# Altium PCB EP3C25.PcbDoc (part 2 of 4)
Units mil, origin at the board's own origin, x right, y up, seen from the top; angles counter-clockwise.
Board outline 6000 x 4000 mil, 2 copper layers (Top Layer, Bottom Layer); 113 components, 182 nets, 855 pads, 215 vias.
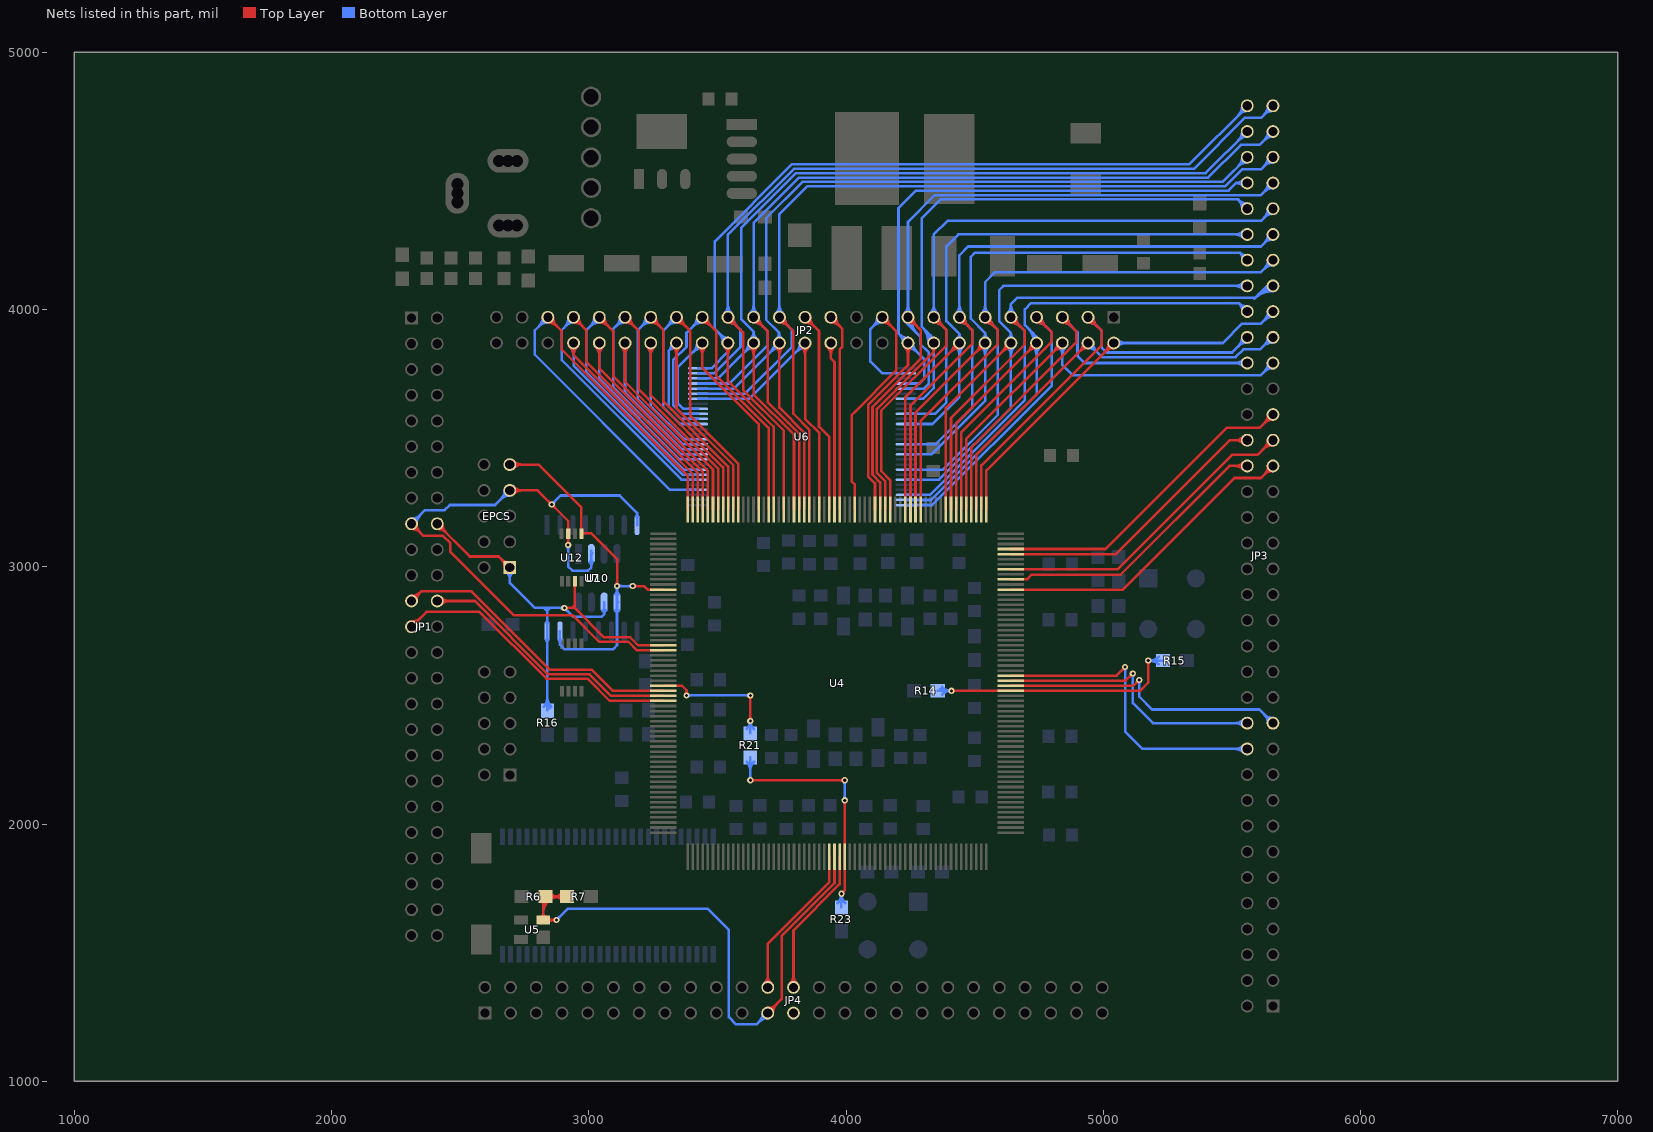
[diagram p2: the nets of this part, all layers, seen from the top]

## Via types
v1: diameter 24, hole 12, Top Layer to Bottom Layer, 205 vias
v2: diameter 40, hole 20, Top Layer to Bottom Layer, 6 vias
v3: diameter 250, hole 130, Top Layer to Bottom Layer, 3 vias
v4: diameter 250, hole 150, Top Layer to Bottom Layer, 1 vias

## Nets (pads, with @x,y where several pads share a name; then routed paths per layer and width w, separated by ;. In a path a pad name is that pad's centre, name@x,y a point inside that pad or via, vN(x,y) a via of type N, cw(c..) or ccw(c..) an arc to the next point about the centre after c; other vN are vias at no path point) (continued)
169: JP3.43 U4.169 | length 1294.5
  Top Layer w10: U4.169@4640.39,2911.47 5076.47,2911.47 5510,3345 5613,3345 JP3.43@5660,3392 ; JP3.43@5640,3392 cw(c5591.72,3392) 5625.86,3357.86 cw(c5660,3323.72) JP3.43@5660,3372
171: JP3.44 U4.171 | length 1284.3
  Top Layer w10: U4.171@4640.39,2950.84 4702.84,2950.84 4721,2969 5067,2969 5490,3392 JP3.44@5560,3392 5517,3392 ; JP3.44@5544.7,3379.11 ccw(c5517,3355.78) 5517,3392 ; JP3.44@5544.7,3404.89 cw(c5517,3428.22) 5517,3392 ; JP3.44@5545.86,3377.86 ccw(c5511.72,3343.72) 5511.72,3392 ccw(c5511.72,3440.28) JP3.44@5545.86,3406.14
173: JP3.45 U4.173 | length 1328
  Top Layer w10: U4.173@4640.39,2990.21 5055.21,2990.21 5500,3435 5600,3435 5657,3492 JP3.45@5660,3492 ; 5620.74,3455.74 cw(c5660,3416.47) JP3.45@5660,3472 ; 5627.98,3462.98 ccw(c5598.96,3492) JP3.45@5640,3492 ; 5637.81,3472.81 cw(c5660,3450.62) JP3.45@5660,3482
176: JP3.46 U4.176 | length 1178.8
  Top Layer w10: U4.176@4640.39,3049.26 5049.26,3049.26 5492,3492 JP3.46@5560,3492 ; JP3.46@5545.86,3477.86 ccw(c5511.72,3443.72) 5511.72,3492 ccw(c5511.72,3540.28) JP3.46@5545.86,3506.14
177: JP3.47 U4.177 | length 1312.1
  Top Layer w10: U4.177@4640.39,3068.95 5008.95,3068.95 5480,3540 5608,3540 JP3.47@5660,3592 ; JP3.47@5640,3592 cw(c5591.72,3592) 5625.86,3557.86 cw(c5660,3523.72) JP3.47@5660,3572
181: JP2.2 JP3.55 U4.181 | length 1749.7
  Top Layer w10: U4.181@4545.9,3222.49 4545.9,3374.9 JP2.2@5041,3870 ; JP2.2@5021,3870 cw(c4972.72,3870) 5006.86,3835.86 cw(c5041,3801.72) JP2.2@5041,3850
  Bottom Layer w10: JP2.2@5041,3870 5465,3870 5540,3945 5613,3945 JP3.55@5660,3992 ; JP2.2@5055.14,3855.86 cw(c5089.28,3821.72) 5089.28,3870 cw(c5089.28,3918.28) JP2.2@5055.14,3884.14 ; JP3.55@5640,3992 cw(c5591.72,3992) 5625.86,3957.86 cw(c5660,3923.72) JP3.55@5660,3972
182: JP2.3 JP3.54 U4.182 | length 1929.9
  Top Layer w10: U4.182@4526.22,3222.49 4526.22,3393.89 4995,3862.67 4995,3916 JP2.3@4941,3970 ; JP2.3@4941,3950 cw(c4941,3901.72) 4975.14,3935.86 cw(c5009.28,3970) JP2.3@4961,3970
  Bottom Layer w10: JP2.3@4941,3950 cw(c4941,3901.72) 4975.14,3935.86 cw(c5009.28,3970) JP2.3@4961,3970 ; JP2.3@4941,3970 4995,3916 4995,3851 5013,3833 5501,3833 JP3.54@5560,3892 ; JP3.54@5540,3892 cw(c5491.72,3892) 5525.86,3857.86 cw(c5560,3823.72) JP3.54@5560,3872
183: JP2.4 JP3.53 U4.183 | length 1853.3
  Top Layer w10: U4.183@4506.53,3222.49 4506.53,3435.53 JP2.4@4941,3870 ; JP2.4@4921,3870 cw(c4872.72,3870) 4906.86,3835.86 cw(c4941,3801.72) JP2.4@4941,3850
  Bottom Layer w10: JP2.4@4941,3850 cw(c4941,3801.72) 4975.14,3835.86 cw(c5009.28,3870) JP2.4@4961,3870 ; JP2.4@4941,3870 4996,3815 5515,3815 5545,3845 5610,3845 5657,3892 JP3.53@5660,3892 ; 5620.74,3855.74 cw(c5660,3816.47) JP3.53@5660,3872 ; 5627.98,3862.98 ccw(c5598.96,3892) JP3.53@5640,3892 ; 5637.81,3872.81 cw(c5660,3850.62) JP3.53@5660,3882
184: JP2.5 JP3.52 U4.184 | length 2012.5
  Top Layer w10: U4.184@4486.85,3222.49 4486.85,3463.52 4895,3871.67 4895,3916 JP2.5@4841,3970 ; JP2.5@4841,3950 cw(c4841,3901.72) 4875.14,3935.86 cw(c4909.28,3970) JP2.5@4861,3970
  Bottom Layer w10: JP2.5@4841,3950 cw(c4841,3901.72) 4875.14,3935.86 cw(c4909.28,3970) JP2.5@4861,3970 ; JP2.5@4841,3970 4900,3911 4900,3820 4928,3792 JP3.52@5560,3792 ; JP3.52@5545.86,3777.86 ccw(c5511.72,3743.72) 5511.72,3792 ccw(c5511.72,3840.28) JP3.52@5545.86,3806.14
185: JP2.6 JP3.51 U4.185 | length 1970.5
  Top Layer w10: U4.185@4467.16,3222.49 4467.16,3496.16 JP2.6@4841,3870 ; JP2.6@4821,3870 cw(c4772.72,3870) 4806.86,3835.86 cw(c4841,3801.72) JP2.6@4841,3850
  Bottom Layer w10: JP2.6@4826.86,3855.86 cw(c4792.72,3821.72) 4841,3821.72 cw(c4889.28,3821.72) JP2.6@4855.14,3855.86 ; JP2.6@4841,3870 4841,3784 4880,3745 5613,3745 JP3.51@5660,3792 ; JP3.51@5640,3792 cw(c5591.72,3792) 5625.86,3757.86 cw(c5660,3723.72) JP3.51@5660,3772
186: JP2.7 U4.186 U6.56 | length 2119.4
  Top Layer w10: U4.186@4447.48,3222.49 4447.48,3522.48 4800,3875 4800,3911 JP2.7@4741,3970 ; JP2.7@4741,3950 cw(c4741,3901.72) 4775.14,3935.86 cw(c4809.28,3970) JP2.7@4761,3970
  Bottom Layer w10: U6.56@4232.4,3240 4335.17,3240 4800,3704.83 4800,3911 JP2.7@4741,3970 ; JP2.7@4741,3950 cw(c4741,3901.72) 4775.14,3935.86 cw(c4809.28,3970) JP2.7@4761,3970
187: JP2.8 JP3.56 U4.187 U6.55 | length 3027.6
  Top Layer w10: U4.187@4427.79,3222.49 4427.79,3556.79 JP2.8@4741,3870 ; JP2.8@4721,3870 cw(c4672.72,3870) 4706.86,3835.86 cw(c4741,3801.72) JP2.8@4741,3850
  Bottom Layer w10: U6.55@4232.4,3259.69 4330.81,3259.69 4741,3669.88 JP2.8@4741,3870 ; 4706.96,3928.04 cw(c4648.92,3870) JP2.8@4731,3870 ; 4724.03,3910.97 cw(c4683.06,3870) JP2.8@4741,3870 ; JP2.8@4726.86,3855.86 cw(c4692.72,3821.72) 4741,3821.72 cw(c4789.28,3821.72) JP2.8@4755.14,3855.86 ; JP3.56@5540.01,3992.49 ccw(c5495.57,3993.57) 5527,4025 ; JP3.56@5559.51,4011.99 cw(c5558.43,4056.43) 5527,4025 ; JP3.56@5560,3992 5527,4025 ; JP2.8@4741,3870 4741,3894 4695,3940 4695,4000 4720,4025 5527,4025
188: JP2.9 JP3.57 U4.188 U6.54 | length 3363.1
  Top Layer w10: U4.188@4408.11,3222.49 4408.11,3578.11 4695,3865 4695,3916 JP2.9@4641,3970 ; JP2.9@4641,3950 cw(c4641,3901.72) 4675.14,3935.86 cw(c4709.28,3970) JP2.9@4661,3970
  Bottom Layer w10: U6.54@4232.4,3279.37 4326.45,3279.37 4695,3647.92 4695,3915.96 JP2.9@4641,3970 ; JP2.9@4626.86,3984.14 ccw(c4592.72,4018.28) 4641,4018.28 ccw(c4689.28,4018.28) JP2.9@4655.14,3984.14 ; JP2.9@4641,3950 cw(c4641,3901.82) 4675.07,3935.89 ; JP2.9@4641,3970 4641,4021 4665,4045 5590,4045 5637,4092 JP3.57@5660,4092 ccw(c5660,4036.47) 5620.74,4075.74 ; JP2.9@4661,3970 ccw(c4709.38,3970) 4675.17,3935.79 ; 5586.59,4041.59 cw(c5660,3968.19) JP3.57@5660,4072 ; 5603.67,4058.67 cw(c5660,4002.33) JP3.57@5660,4082
189: JP2.10 JP3.58 U4.189 U6.51 | length 3005.3
  Top Layer w10: U4.189@4388.42,3222.49 4388.42,3617.42 JP2.10@4641,3870 ; JP2.10@4621,3870 cw(c4572.72,3870) 4606.86,3835.86 cw(c4641,3801.72) JP2.10@4641,3850
  Bottom Layer w10: U6.51@4232.4,3338.43 4361.47,3338.43 4641,3617.96 JP2.10@4641,3870 4641,3909 ; JP2.10@4626.86,3855.86 cw(c4592.72,3821.72) 4641,3821.72 cw(c4689.28,3821.72) JP2.10@4655.14,3855.86 ; JP2.10@4629.33,3886.24 ccw(c4612.98,3909) 4641,3909 ; JP2.10@4652.67,3886.24 cw(c4669.02,3909) 4641,3909 ; JP3.58@5545.86,4077.86 ccw(c5511.72,4043.72) 5511.72,4092 ccw(c5511.72,4140.28) JP3.58@5545.86,4106.14 ; JP3.58@5560,4092 4612,4092 4595,4075 4595,3955 4641,3909
194: JP2.11 JP3.59 U4.194 U6.49 | length 3352.1
  Top Layer w10: U4.194@4290,3222.49 4290,3566.67 4590,3866.67 4590,3920 4541,3969 JP2.11@4541,3970 ; JP2.11@4541,3950 cw(c4541,3904.13) 4573.44,3936.56 ; JP2.11@4551,3970 ccw(c4577.56,3970) 4558.78,3951.22 ; JP2.11@4561,3970 ccw(c4611.7,3970) 4575.85,3934.15
  Bottom Layer w10: U6.49@4232.4,3377.8 4376.8,3377.8 4590,3591 4590,3921 JP2.11@4541,3970 4541,4106 4580,4145 5613,4145 JP3.59@5660,4192 ; JP2.11@4526.86,3984.14 ccw(c4492.72,4018.28) 4541,4018.28 ccw(c4589.28,4018.28) JP2.11@4555.14,3984.14 ; JP2.11@4541,3950 cw(c4541,3901.72) 4575.14,3935.86 cw(c4609.28,3970) JP2.11@4561,3970 ; JP3.59@5640,4192 cw(c5591.72,4192) 5625.86,4157.86 cw(c5660,4123.72) JP3.59@5660,4172
195: JP2.12 JP3.60 U4.195 U6.46 | length 3089.9
  Top Layer w10: U4.195@4270.31,3222.49 4270.31,3599.31 JP2.12@4541,3870 ; JP2.12@4521,3870 cw(c4472.72,3870) 4506.86,3835.86 cw(c4541,3801.72) JP2.12@4541,3850
  Bottom Layer w10: U6.46@4232.4,3436.85 4332.89,3436.85 4541,3644.96 JP2.12@4541,3870 4541,3909 ; JP2.12@4526.86,3855.86 cw(c4492.72,3821.72) 4541,3821.72 cw(c4589.28,3821.72) JP2.12@4555.14,3855.86 ; JP2.12@4529.33,3886.24 ccw(c4512.98,3909) 4541,3909 ; JP2.12@4552.67,3886.24 cw(c4569.02,3909) 4541,3909 ; JP3.60@5540.22,4194.99 ccw(c5511.36,4199.35) 5532,4220 ; JP3.60@5557.01,4211.78 cw(c5552.65,4240.64) 5532,4220 ; JP3.60@5560,4192 5532,4220 ; 4541,3909 4485,3965 4485,4205 4500,4220 5532,4220
196: JP2.13 JP3.61 U4.196 U6.44 | length 3352.5
  Top Layer w10: U4.196@4250.63,3222.49 4250.63,3627.3 4490,3866.67 4490,3921 JP2.13@4441,3970 ; JP2.13@4441,3950 cw(c4441,3901.72) 4475.14,3935.86 cw(c4509.28,3970) JP2.13@4461,3970
  Bottom Layer w10: U6.44@4232.4,3476.22 4348.22,3476.22 4490,3618 4490,3921 JP2.13@4441,3970 4441,4211 4475,4245 5613,4245 JP3.61@5660,4292 ; JP2.13@4426.86,3984.14 ccw(c4392.72,4018.28) 4441,4018.28 ccw(c4489.28,4018.28) JP2.13@4455.14,3984.14 ; JP2.13@4441,3950 cw(c4441,3901.72) 4475.14,3935.86 cw(c4509.28,3970) JP2.13@4461,3970 ; JP3.61@5640,4292 cw(c5591.72,4292) 5625.86,4257.86 cw(c5660,4223.72) JP3.61@5660,4272
197: JP2.14 JP3.62 U4.197 U6.40 | length 3050
  Top Layer w10: U4.197@4230.94,3222.49 4230.94,3659.94 JP2.14@4441,3870 ; JP2.14@4421,3870 cw(c4372.72,3870) 4406.86,3835.86 cw(c4441,3801.72) JP2.14@4441,3850
  Bottom Layer w10: U6.40@4232.4,3554.96 4336,3554.96 4441,3659.96 JP2.14@4441,3870 4441,3904 ; JP2.14@4426.86,3855.86 cw(c4392.72,3821.72) 4441,3821.72 cw(c4489.28,3821.72) JP2.14@4455.14,3855.86 ; JP2.14@4431.28,3887.48 ccw(c4422.1,3904) 4441,3904 ; JP2.14@4450.72,3887.48 cw(c4459.9,3904) 4441,3904 ; JP3.62@5545.86,4277.86 ccw(c5511.72,4243.72) 5511.72,4292 ccw(c5511.72,4340.28) JP3.62@5545.86,4306.14 ; JP3.62@5560,4292 4437,4292 4390,4245 4390,3955 4441,3904
200: JP2.15 JP3.63 U4.200 U6.38 | length 3400.3
  Top Layer w10: U4.200@4171.89,3222.49 4171.89,3337.11 4137,3372 4137,3607 4390,3860 4390,3921 JP2.15@4341,3970 ; JP2.15@4341,3950 cw(c4341,3901.72) 4375.14,3935.86 cw(c4409.28,3970) JP2.15@4361,3970
  Bottom Layer w10: U6.38@4232.4,3594.33 4346.33,3594.33 4390,3638 4390,3921 JP2.15@4341,3970 4341,4291 4395,4345 5613,4345 JP3.63@5660,4392 ; JP2.15@4326.86,3984.14 ccw(c4292.72,4018.28) 4341,4018.28 ccw(c4389.28,4018.28) JP2.15@4355.14,3984.14 ; JP2.15@4341,3950 cw(c4341,3901.72) 4375.14,3935.86 cw(c4409.28,3970) JP2.15@4361,3970 ; JP3.63@5640,4392 cw(c5591.72,4392) 5625.86,4357.86 cw(c5660,4323.72) JP3.63@5660,4372
201: JP2.16 JP3.64 U4.201 U6.35 | length 3140.2
  Top Layer w10: U4.201@4152.2,3222.49 4152.2,3332.75 4120,3364.96 4120,3614.04 4341,3835.04 ; JP2.16@4330.86,3852.76 cw(c4320.45,3835.04) 4341,3835.04 ; JP2.16@4341,3870 4341,3835.04 ; JP2.16@4351.14,3852.76 ccw(c4361.55,3835.04) 4341,3835.04
  Bottom Layer w10: U6.35@4232.4,3653.39 4300.39,3653.39 4341,3694 4341,3887 4295,3933 4295,4355 4368,4428 5524,4428 JP3.64@5560,4392 ; 4294.84,3933.16 cw(c4231.67,3870) JP2.16@4321,3870 ; 4311.91,3916.09 cw(c4265.82,3870) JP2.16@4331,3870 ; 4328.98,3899.02 cw(c4299.96,3870) JP2.16@4341,3870 ; JP3.64@5540,4392 ccw(c5491.72,4392) 5525.86,4426.14 ccw(c5560,4460.28) JP3.64@5560,4412
202: JP2.17 JP3.65 U4.202 U6.33 | length 3555.5
  Top Layer w10: U4.202@4132.52,3222.49 4132.52,3328.4 4103,3357.92 4103,3621.08 4290,3808.08 4290,3921 JP2.17@4241,3970 ; JP2.17@4241,3950 cw(c4241,3901.72) 4275.14,3935.86 cw(c4309.28,3970) JP2.17@4261,3970
  Bottom Layer w10: JP2.17@4226.86,3984.14 ccw(c4192.72,4018.28) 4241,4018.28 ccw(c4289.28,4018.28) JP2.17@4255.14,3984.14 ; JP2.17@4231.43,3972.89 ccw(c4258.77,3964.63) 4238.57,3944.43 ; U6.33@4232.4,3692.76 4302.76,3692.76 4322,3712 4322,3833 4288,3867 4288,3895 4241,3942 ; JP2.17@4241,3970 ccw(c4276.9,3959.14) 4250.38,3932.62 ; JP2.17@4250.57,3967.11 ccw(c4295.04,3953.66) 4262.19,3920.81 ; JP2.17@4260.14,3964.21 ccw(c4313.17,3948.17) 4274,3909 ; JP3.65@5640,4492 cw(c5591.72,4492) 5625.86,4457.86 cw(c5660,4423.72) JP3.65@5660,4472 ; JP3.65@5660,4492 5613,4445 4345,4445 4241,4341 4241,3942 ; 4241,3942 ccw(c4231.4,3942) 4234.51,3951.08 cw(c4231.4,3942) 4241,3942 ; 4241,3942 cw(c4250.6,3942) 4247.49,3951.08 ccw(c4250.6,3942) 4241,3942
203: JP2.18 JP3.66 U4.203 U6.32 | length 3194.6
  Top Layer w10: U4.203@4112.83,3222.49 4112.83,3324.04 4086,3350.88 4086,3629 4241,3784 JP2.18@4241,3870 ; JP2.18@4226.86,3855.86 cw(c4192.72,3821.72) 4241,3821.72 cw(c4289.28,3821.72) JP2.18@4255.14,3855.86
  Bottom Layer w10: JP2.18@4221,3870 ccw(c4172.72,3870) 4206.86,3904.14 ccw(c4241,3938.28) JP2.18@4241,3890 ; U6.32@4232.4,3712.44 4285.44,3712.44 4305,3732 4305,3806 JP2.18@4241,3870 4204,3907 4204,4394 4272,4462 5487,4462 5517,4492 ; JP2.18@4241,3850 cw(c4241,3801.72) 4275.14,3835.86 cw(c4309.28,3870) JP2.18@4261,3870 ; JP3.66@5544.7,4479.11 ccw(c5517,4455.78) 5517,4492 ; JP3.66@5544.7,4504.89 cw(c5517,4528.22) 5517,4492 ; JP3.66@5560,4492 5517,4492
207: JP2.19 U4.207 U6.30 | length 1345.8
  Top Layer w10: U4.207@4034.09,3222.49 4034.09,3289 4034.09,3318.91 4022,3331 4022,3590 4034.09,3602.09 4195,3763 4195,3916 JP2.19@4141,3970 ; JP2.19@4141,3950 cw(c4141,3901.72) 4175.14,3935.86 cw(c4209.28,3970) JP2.19@4161,3970
  Bottom Layer w10: JP2.19@4121,3970 cw(c4072.72,3970) 4106.86,3935.86 cw(c4141,3901.72) JP2.19@4141,3950 ; JP2.19@4141,3970 4095,3924 4095,3798 4141.19,3751.81 U6.30@4232.4,3751.81
214: JP2.26 U4.214 U6.22 | length 1327.8
  Top Layer w10: JP2.26@3826.86,3855.86 cw(c3792.72,3821.72) 3841,3821.72 cw(c3889.28,3821.72) JP2.26@3855.14,3855.86 ; JP2.26@3841,3870 3841,3574.96 3896.3,3519.66 U4.214@3896.3,3222.49
  Bottom Layer w10: U6.22@3425,3653.39 3624.39,3653.39 JP2.26@3841,3870 ; JP2.26@3821,3870 cw(c3772.72,3870) 3806.86,3835.86 cw(c3841,3801.72) JP2.26@3841,3850
216: JP2.27 JP3.67 U4.216 U6.23 | length 4086.1
  Top Layer w10: JP2.27@3741,3950 cw(c3741,3901.72) 3775.14,3935.86 cw(c3809.28,3970) JP2.27@3761,3970 ; JP2.27@3741,3970 3795,3916 3795,3595 3856.93,3533.07 U4.216@3856.93,3222.49
  Bottom Layer w10: U6.23@3425,3673.07 3608.07,3673.07 3790,3855 3790,3921 JP2.27@3741,3970 3741,4371 3849,4479 5474,4479 5540,4545 5613,4545 JP3.67@5660,4592 ; JP2.27@3726.86,3984.14 ccw(c3692.72,4018.28) 3741,4018.28 ccw(c3789.28,4018.28) JP2.27@3755.14,3984.14 ; JP2.27@3741,3950 cw(c3741,3901.72) 3775.14,3935.86 cw(c3809.28,3970) JP2.27@3761,3970 ; JP3.67@5640,4592 cw(c5591.72,4592) 5625.86,4557.86 cw(c5660,4523.72) JP3.67@5660,4572
217: JP2.28 JP3.68 U4.217 U6.24 | length 3834.3
  Top Layer w10: JP2.28@3726.86,3855.86 cw(c3692.72,3821.72) 3741,3821.72 cw(c3789.28,3821.72) JP2.28@3755.14,3855.86 ; JP2.28@3741,3870 3741,3618.33 3837.24,3522.08 U4.217@3837.24,3222.49
  Bottom Layer w10: U6.24@3425,3692.76 3563.76,3692.76 JP2.28@3741,3870 3740,3871 3740,3910 ; JP2.28@3721,3870 cw(c3672.72,3870) 3706.86,3835.86 cw(c3741,3801.72) JP2.28@3741,3850 ; JP2.28@3728.36,3885.5 ccw(c3708.4,3910) 3740,3910 ; JP2.28@3752.36,3886.46 cw(c3768.59,3910) 3740,3910 ; JP3.68@5540,4592 cw(c5491.72,4592) 5525.86,4557.86 cw(c5560,4523.72) JP3.68@5560,4572 ; JP3.68@5560,4592 5464,4496 3831,4496 3690,4355 3690,3960 3740,3910
218: JP2.29 JP3.69 U4.218 U6.25 | length 4120
  Top Layer w10: JP2.29@3641,3950 cw(c3641,3901.72) 3675.14,3935.86 cw(c3709.28,3970) JP2.29@3661,3970 ; JP2.29@3641,3970 3695,3916 3695,3640.29 3817.56,3517.73 U4.218@3817.56,3222.49
  Bottom Layer w10: U6.25@3425,3712.44 3547.44,3712.44 3695,3860 3695,3916 JP2.29@3641,3970 3641,4336 3818,4513 5408,4513 5535,4640 5608,4640 JP3.69@5660,4692 ; JP2.29@3626.86,3984.14 ccw(c3592.72,4018.28) 3641,4018.28 ccw(c3689.28,4018.28) JP2.29@3655.14,3984.14 ; JP2.29@3641,3950 cw(c3641,3901.72) 3675.14,3935.86 cw(c3709.28,3970) JP2.29@3661,3970 ; JP3.69@5640,4692 cw(c5591.72,4692) 5625.86,4657.86 cw(c5660,4623.72) JP3.69@5660,4672
219: JP2.30 JP3.70 U4.219 U6.26 | length 3868
  Top Layer w10: JP2.30@3626.86,3855.86 cw(c3592.72,3821.72) 3641,3821.72 cw(c3689.28,3821.72) JP2.30@3655.14,3855.86 ; JP2.30@3641,3870 3641,3670.24 3797.87,3513.37 U4.219@3797.87,3222.49
  Bottom Layer w10: U6.26@3425,3732.13 3503.13,3732.13 JP2.30@3641,3870 3641,3914 ; JP2.30@3621,3870 cw(c3572.72,3870) 3606.86,3835.86 cw(c3641,3801.72) JP2.30@3641,3850 ; JP2.30@3627.85,3885.07 ccw(c3602.6,3914) 3641,3914 ; JP2.30@3654.15,3885.07 cw(c3679.4,3914) 3641,3914 ; JP3.70@5540,4692 cw(c5491.72,4692) 5525.86,4657.86 cw(c5560,4623.72) JP3.70@5560,4672 ; JP3.70@5560,4692 5398,4530 3805,4530 3593.5,4318.5 3593.5,3961.5 3641,3914
221: JP2.31 JP3.71 U4.221 U6.27 | length 4131.5
  Top Layer w10: JP2.31@3541,3950 cw(c3541,3901.72) 3575.14,3935.86 cw(c3609.28,3970) JP2.31@3561,3970 ; JP2.31@3541,3970 3600,3911 3600,3687.2 3758.5,3528.7 U4.221@3758.5,3222.49
  Bottom Layer w10: U6.27@3425,3751.81 3486.81,3751.81 3590,3855 3590,3921 JP2.31@3541,3970 3541,4291 3797,4547 5352,4547 5550,4745 5613,4745 JP3.71@5660,4792 ; JP2.31@3526.86,3984.14 ccw(c3492.72,4018.28) 3541,4018.28 ccw(c3589.28,4018.28) JP2.31@3555.14,3984.14 ; JP2.31@3541,3950 cw(c3541,3901.72) 3575.14,3935.86 cw(c3609.28,3970) JP2.31@3561,3970 ; JP3.71@5640,4792 cw(c5591.72,4792) 5625.86,4757.86 cw(c5660,4723.72) JP3.71@5660,4772
223: JP2.32 JP3.72 U4.223 U6.28 | length 3920.6
  Top Layer w10: JP2.32@3526.86,3855.86 cw(c3492.72,3821.72) 3541,3821.72 cw(c3589.28,3821.72) JP2.32@3555.14,3855.86 ; JP2.32@3541,3870 3541,3722.16 3719.13,3544.03 U4.223@3719.13,3222.49
  Bottom Layer w10: U6.28@3425,3771.5 3476.5,3771.5 3541,3836 ; 3504.03,3910.97 cw(c3463.06,3870) JP2.32@3521,3870 ; 3513.69,3901.31 ccw(c3541,3928.63) JP2.32@3541,3890 ; 3521.1,3893.9 cw(c3497.2,3870) JP2.32@3531,3870 ; JP2.32@3531.28,3852.52 cw(c3522.1,3836) 3541,3836 ; JP2.32@3550.72,3852.52 ccw(c3559.9,3836) 3541,3836 ; 5524.44,4754.44 ccw(c5486.89,4792) JP3.72@5540,4792 ; 5529.27,4759.27 cw(c5560,4728.54) JP3.72@5560,4772 ; 5541.51,4771.51 ccw(c5521.03,4792) JP3.72@5550,4792 ; JP3.72@5560,4792 5560,4790 5334,4564 3789,4564 3490,4265 3490,3925 3541,3874 JP2.32@3541,3870 3541,3836
224: JP2.33 U4.224 U6.19 | length 1505.1
  Top Layer w10: JP2.33@3441,3950 cw(c3441,3901.72) 3475.14,3935.86 cw(c3509.28,3970) JP2.33@3461,3970 ; JP2.33@3441,3970 3495,3916 3495,3744.12 3699.45,3539.67 U4.224@3699.45,3222.49
  Bottom Layer w10: JP2.33@3421,3970 cw(c3372.72,3970) 3406.86,3935.86 cw(c3441,3901.72) JP2.33@3441,3950 ; U6.19@3425,3594.33 3363.21,3594.33 3328,3629.54 3328,3803 3380,3855 3380,3909 JP2.33@3441,3970
226: JP2.34 U4.226 U6.20 | length 1252.5
  Top Layer w10: JP2.34@3426.86,3855.86 cw(c3392.72,3821.72) 3441,3821.72 cw(c3489.28,3821.72) JP2.34@3455.14,3855.86 ; JP2.34@3441,3870 3441,3774.08 3660.08,3555 U4.226@3660.08,3222.49
  Bottom Layer w10: JP2.34@3421,3870 cw(c3372.72,3870) 3406.86,3835.86 cw(c3441,3801.72) JP2.34@3441,3850 ; U6.20@3425,3614.02 3367.57,3614.02 3345,3636.58 3345,3774 JP2.34@3441,3870
230: JP2.35 U4.230 U6.17 | length 1532.1
  Top Layer w10: JP2.35@3341,3950 cw(c3341,3901.72) 3375.14,3935.86 cw(c3409.28,3970) JP2.35@3361,3970 ; JP2.35@3341,3970 3395,3916 3395,3585.42 3581.34,3399.08 U4.230@3581.34,3222.49
  Bottom Layer w10: JP2.35@3321,3970 cw(c3272.72,3970) 3306.86,3935.86 cw(c3341,3901.72) JP2.35@3341,3950 ; JP2.35@3341,3970 3290,3919 3290,3619.46 3354.5,3554.96 U6.17@3425,3554.96
231: JP2.36 U4.231 U6.18 | length 1270.2
  Top Layer w10: JP2.36@3326.86,3855.86 cw(c3292.72,3821.72) 3341,3821.72 cw(c3389.28,3821.72) JP2.36@3355.14,3855.86 ; JP2.36@3341,3870 3341,3615.37 3561.65,3394.72 U4.231@3561.65,3222.49
  Bottom Layer w10: JP2.36@3321.09,3868.09 cw(c3286.26,3864.75) 3311,3840 ; JP2.36@3339.09,3850.09 ccw(c3335.75,3815.26) 3311,3840 ; JP2.36@3341,3870 3311,3840 ; U6.18@3425,3574.65 3358.85,3574.65 3311,3622.5 3311,3840
232: JP2.37 U4.232 U6.13 | length 1670.2
  Top Layer w10: JP2.37@3241,3950 cw(c3241,3901.72) 3275.14,3935.86 cw(c3309.28,3970) JP2.37@3261,3970 ; JP2.37@3241,3970 3290,3921 3290,3642.33 3541.97,3390.36 U4.232@3541.97,3222.49
  Bottom Layer w10: JP2.37@3221,3970 cw(c3172.72,3970) 3206.86,3935.86 cw(c3241,3901.72) JP2.37@3241,3950 ; JP2.37@3241,3970 3190,3919 3190,3652.96 3366.74,3476.22 U6.13@3425,3476.22
233: JP2.38 U4.233 U6.14 | length 1397.6
  Top Layer w10: JP2.38@3226.86,3855.86 cw(c3192.72,3821.72) 3241,3821.72 cw(c3289.28,3821.72) JP2.38@3255.14,3855.86 ; JP2.38@3241,3870 3241,3667.29 3522.28,3386.01 U4.233@3522.28,3222.49
  Bottom Layer w10: JP2.38@3226.86,3855.86 cw(c3192.72,3821.72) 3241,3821.72 cw(c3289.28,3821.72) JP2.38@3255.14,3855.86 ; JP2.38@3241,3870 3241,3626 3371.09,3495.91 U6.14@3425,3495.91
234: JP2.39 U4.234 U6.11 | length 1777.1
  Top Layer w10: JP2.39@3141,3950 cw(c3141,3901.72) 3175.14,3935.86 cw(c3209.28,3970) JP2.39@3161,3970 ; JP2.39@3141,3970 3195,3916 3195,3689.25 3502.6,3381.65 U4.234@3502.6,3222.49
  Bottom Layer w10: JP2.39@3121,3970 cw(c3072.72,3970) 3106.86,3935.86 cw(c3141,3901.72) JP2.39@3141,3950 ; JP2.39@3141,3970 3095,3924 3095,3699.88 3358.03,3436.85 U6.11@3425,3436.85
235: JP2.40 U4.235 U6.12 | length 1508.6
  Top Layer w10: JP2.40@3126.86,3855.86 cw(c3092.72,3821.72) 3141,3821.72 cw(c3189.28,3821.72) JP2.40@3155.14,3855.86 ; JP2.40@3141,3870 3141,3719.21 3482.91,3377.29 U4.235@3482.91,3222.49
  Bottom Layer w10: JP2.40@3126.86,3855.86 cw(c3092.72,3821.72) 3141,3821.72 cw(c3189.28,3821.72) JP2.40@3155.14,3855.86 ; JP2.40@3141,3870 3141,3677.92 3362.38,3456.54 U6.12@3425,3456.54
236: JP2.41 U4.236 U6.8 | length 1900.4
  Top Layer w10: JP2.41@3041,3950 cw(c3041,3901.72) 3075.14,3935.86 cw(c3109.28,3970) JP2.41@3061,3970 ; JP2.41@3041,3970 3095,3916 3095,3741.17 3463.23,3372.94 U4.236@3463.23,3222.49
  Bottom Layer w10: JP2.41@3021,3970 cw(c2972.72,3970) 3006.86,3935.86 cw(c3041,3901.72) JP2.41@3041,3950 ; JP2.41@3041,3970 2990,3919 2990,3756.79 3369,3377.8 U6.8@3425,3377.8
237: JP2.42 U4.237 U6.10 | length 1619.6
  Top Layer w10: JP2.42@3026.86,3855.86 cw(c2992.72,3821.72) 3041,3821.72 cw(c3089.28,3821.72) JP2.42@3055.14,3855.86 ; JP2.42@3041,3870 3041,3771.12 3443.54,3368.58 U4.237@3443.54,3222.49
  Bottom Layer w10: JP2.42@3026.86,3855.86 cw(c2992.72,3821.72) 3041,3821.72 cw(c3089.28,3821.72) JP2.42@3055.14,3855.86 ; JP2.42@3041,3870 3041,3729.83 3353.67,3417.17 U6.10@3425,3417.17
238: JP2.43 U4.238 U6.6 | length 2033.8
  Top Layer w10: JP2.43@2941,3950 cw(c2941,3901.72) 2975.14,3935.86 cw(c3009.28,3970) JP2.43@2961,3970 ; JP2.43@2941,3970 2990,3921 2990,3798.08 3423.86,3364.23 U4.238@3423.86,3222.49
  Bottom Layer w10: 2904.03,3929.03 ccw(c2863.06,3970) JP2.43@2921,3970 ; 2913.69,3938.69 cw(c2941,3911.37) JP2.43@2941,3950 ; 2921.1,3946.1 ccw(c2897.2,3970) JP2.43@2931,3970 ; JP2.43@2941,3970 2941,3966 2895,3920 2895,3803.71 3360.28,3338.43 U6.6@3425,3338.43
239: JP2.44 U4.239 U6.7 | length 1735.6
  Top Layer w10: JP2.44@2927.14,3855.58 cw(c2895.88,3823.04) 2941,3823.04 ; JP2.44@2941,3870 2941,3823.04 ; JP2.44@2954.86,3855.58 ccw(c2986.12,3823.04) 2941,3823.04 ; U4.239@3404.17,3222.49 3404.17,3359.87 2941,3823.04
  Bottom Layer w10: JP2.44@2926.86,3855.86 cw(c2892.72,3821.72) 2941,3821.72 cw(c2989.28,3821.72) JP2.44@2955.14,3855.86 ; JP2.44@2941,3870 2941,3781.75 3364.64,3358.11 U6.7@3425,3358.11
240: JP2.45 U4.240 U6.4 | length 2143.3
  Top Layer w10: JP2.45@2841,3950 cw(c2841,3901.72) 2875.14,3935.86 cw(c2909.28,3970) JP2.45@2861,3970 ; JP2.45@2841,3970 2895,3916 2895,3845 3384.49,3355.51 U4.240@3384.49,3222.49
  Bottom Layer w10: JP2.45@2821,3970 cw(c2772.72,3970) 2806.86,3935.86 cw(c2841,3901.72) JP2.45@2841,3950 ; JP2.45@2841,3970 2790,3919 2790,3825 3315.94,3299.06 U6.4@3425,3299.06
ASDI: EPCS.9 U4.12 U7.15 U10.5 U12.5 | length 1748.4
  Top Layer w10: EPCS.9@2693,3397 2805,3397 2971.39,3230.61 U12.5@2971.39,3129.51 ; EPCS.9@2707.14,3382.86 cw(c2741.28,3348.72) 2741.28,3397 cw(c2741.28,3445.28) EPCS.9@2707.14,3411.14 ; U12.5@2971.39,3127.51 U12.5@2971.39,3129.51 ; U12.5@2973.42,3125.48 cw(c2983.15,3115.74) 2983.15,3129.51 ; v1@3105.05,2929.95 ccw(c3093.1,2941.9) 3110,2941.9 ccw(c3126.9,2941.9) v1@3114.95,2929.95 ; v1(3110,2925) 3110,3030 3010.49,3129.51 U12.5@2971.39,3129.51 ; v1(3171,2925) 3215,2925 3228.53,2911.47 U4.12@3290,2911.47 ; v1@3175.95,2920.05 cw(c3187.9,2908.1) 3187.9,2925 cw(c3187.9,2941.9) v1@3175.95,2929.95
  Bottom Layer w10: U7.15@2884.58,2715.66 cw(c2876.31,2707.4) 2888,2707.4 cw(c2899.69,2707.4) U7.15@2891.42,2715.66 ; U7.15@2888,2748.61 2888,2697 2906,2679 3094,2679 3109.84,2694.84 U10.5@3109.84,2861.34 ; U10.5@3103.63,2830.07 cw(c3088.65,2815.09) 3109.84,2815.09 cw(c3131.04,2815.09) U10.5@3116.05,2830.07 ; U10.5@3103.63,2892.61 ccw(c3088.65,2907.59) 3109.84,2907.59 ccw(c3131.04,2907.59) U10.5@3116.05,2892.61 ; v1@3105.05,2920.05 cw(c3093.48,2908.48) 3109.84,2908.48 ; 3109.84,2907.72 cw(c3127.28,2907.72) 3114.95,2920.05 cw(c3126.9,2908.1) 3126.9,2925 cw(c3126.9,2941.9) v1@3114.95,2929.95 ; U10.5@3115.34,2861.34 U10.5@3109.84,2861.34 ; v1@3166.05,2920.05 ccw(c3154.1,2908.1) 3154.1,2925 ccw(c3154.1,2941.9) v1@3166.05,2929.95 ; v1(3171,2925) v1(3110,2925) 3109.84,2924.84 U10.5@3109.84,2861.34
CLK0: R21.1 U4.31 | length 744.2
  Top Layer w10: U4.31@3290,2537.45 3362.55,2537.45 3380,2520 v1(3380,2500) ; v1@3375.05,2504.95 ccw(c3363.1,2516.9) 3380,2516.9 ccw(c3396.9,2516.9) v1@3384.95,2504.95 ; v1@3623.05,2405.95 ccw(c3611.1,2417.9) 3628,2417.9 ccw(c3644.9,2417.9) v1@3632.95,2405.95 ; v1@3623.05,2495.05 cw(c3611.1,2483.1) 3628,2483.1 cw(c3644.9,2483.1) v1@3632.95,2495.05 ; v1(3628,2401) v1(3628,2500)
  Bottom Layer w10: v1(3380,2500) v1(3628,2500) ; v1@3384.95,2495.05 cw(c3396.9,2483.1) 3396.9,2500 cw(c3396.9,2516.9) v1@3384.95,2504.95 ; R21.1@3614.03,2369.1 ccw(c3584.59,2401) v1(3628,2401) ; v1@3623.05,2396.05 cw(c3611.1,2384.1) 3628,2384.1 cw(c3644.9,2384.1) v1@3632.95,2396.05 ; v1@3623.05,2495.05 ccw(c3611.1,2483.1) 3611.1,2500 ccw(c3611.1,2516.9) v1@3623.05,2504.95 ; R21.1@3628,2352 v1(3628,2401) ; R21.1@3641.97,2369.1 cw(c3671.41,2401) v1(3628,2401)
CLK1: JP1.23 U4.32 | length 1230.2
  Top Layer w10: JP1.23@2311,2867 2348,2904 2544.08,2904 2849.08,2599 2916.18,2599 3012.31,2599 3093.54,2517.77 U4.32@3290,2517.77 ; JP1.23@2311,2887 ccw(c2311,2935.28) 2345.14,2901.14 ccw(c2379.28,2867) JP1.23@2331,2867
CLK2: JP1.24 U4.33 | length 1107.7
  Top Layer w10: JP1.24@2411,2867 2557.04,2867 2842.04,2582 3003,2582 3086.92,2498.08 U4.33@3290,2498.08 ; JP1.24@2425.14,2852.86 cw(c2459.28,2818.72) 2459.28,2867 cw(c2459.28,2915.28) JP1.24@2425.14,2881.14
CLK3: JP1.25 U4.34 | length 1222.4
  Top Layer w10: JP1.25@2311,2767 2369,2825 2575,2825 2835,2565 2995,2565 3081.6,2478.4 U4.34@3290,2478.4 ; JP1.25@2311,2787 ccw(c2311,2835.28) 2345.14,2801.14 ccw(c2379.28,2767) JP1.25@2331,2767
CLK4: JP3.22 U4.152 | length 1340.5
  Top Layer w10: U4.152@4640.39,2576.82 4876.82,2576.82 5051.82,2576.82 v1(5085,2610) ; v1@5078,2610 cw(c5061.1,2610) 5073.05,2598.05 cw(c5085,2586.1) v1@5085,2603
  Bottom Layer w10: v1@5080.05,2605.05 cw(c5068.1,2593.1) 5085,2593.1 cw(c5101.9,2593.1) v1@5089.95,2605.05 ; v1(5085,2610) 5085,2360 5153,2292 JP3.22@5560,2292 ; JP3.22@5545.86,2277.86 ccw(c5511.72,2243.72) 5511.72,2292 ccw(c5511.72,2340.28) JP3.22@5545.86,2306.14
CLK5: JP3.24 U4.151 | length 1207.4
  Top Layer w10: U4.151@4640.39,2557.14 4912.14,2557.14 5087.14,2557.14 v1(5115,2585) ; v1@5108,2585 cw(c5091.1,2585) 5103.05,2573.05 cw(c5115,2561.1) v1@5115,2578
  Bottom Layer w10: v1@5110.05,2580.05 cw(c5098.1,2568.1) 5115,2568.1 cw(c5131.9,2568.1) v1@5119.95,2580.05 ; v1(5115,2585) 5115,2470 5193,2392 JP3.24@5560,2392 ; JP3.24@5545.86,2377.86 ccw(c5511.72,2343.72) 5511.72,2392 ccw(c5511.72,2440.28) JP3.24@5545.86,2406.14
CLK6: JP3.23 U4.150 | length 1265.5
  Top Layer w10: U4.150@4640.39,2537.45 5117.45,2537.45 v1(5140,2560) ; v1@5133,2560 cw(c5116.1,2560) 5128.05,2548.05 cw(c5140,2536.1) v1@5140,2553
  Bottom Layer w10: v1@5135.05,2555.05 cw(c5123.1,2543.1) 5140,2543.1 cw(c5156.9,2543.1) v1@5144.95,2555.05 ; v1(5140,2560) 5140,2495 5190,2445 5607,2445 JP3.23@5660,2392 ; JP3.23@5640,2392 ccw(c5591.72,2392) 5625.86,2426.14 ccw(c5660,2460.28) JP3.23@5660,2412
CLK7: R14.2 R15.2 U4.149 | length 1259.5
  Top Layer w10: v1(4410,2517.77) U4.149@4640.39,2517.77 5142.77,2517.77 5175,2550 v1(5175,2635) ; v1@4414.95,2512.82 cw(c4426.9,2500.87) 4426.9,2517.77 cw(c4426.9,2534.67) v1@4414.95,2522.72 ; v1@5170.05,2630.05 cw(c5158.1,2618.1) 5175,2618.1 cw(c5191.9,2618.1) v1@5179.95,2630.05
  Bottom Layer w10: R14.2@4357,2518 4357.23,2517.77 v1(4410,2517.77) ; R14.2@4366.46,2525.49 ccw(c4385.1,2544.13) 4385.1,2517.77 ; R14.2@4373.53,2503.44 cw(c4408.11,2468.86) v1@4408.11,2517.77 ; R14.2@4373.53,2532.56 ccw(c4409.24,2568.27) v1@4409.24,2517.77 ; v1@4405.05,2512.82 ccw(c4393.1,2500.87) 4393.1,2517.77 ccw(c4393.1,2534.67) v1@4405.05,2522.72 ; v1(5175,2635) R15.2@5235,2635 ; v1@5179.95,2630.05 cw(c5191.9,2618.1) 5191.9,2635 cw(c5191.9,2651.9) v1@5179.95,2639.95 ; R15.2@5215.47,2620.44 ccw(c5180.32,2585.29) 5180.32,2635 ccw(c5180.32,2684.71) R15.2@5215.47,2649.56
CLK9: JP2.23 U4.210 | length 845.7
  Top Layer w10: JP2.23@3941,3950 cw(c3941,3901.72) 3975.14,3935.86 cw(c4009.28,3970) JP2.23@3961,3970 ; JP2.23@3941,3970 3985,3926 3985,3854 3975.04,3844.04 U4.210@3975.04,3222.49
CLK10: JP2.24 U4.211 | length 729.3
  Top Layer w10: JP2.24@3926.86,3855.86 cw(c3892.72,3821.72) 3941,3821.72 cw(c3989.28,3821.72) JP2.24@3955.14,3855.86 ; JP2.24@3941,3870 3941,3810 3955.35,3795.65 U4.211@3955.35,3222.49
CLK11: JP2.25 U4.212 | length 862.6
  Top Layer w10: JP2.25@3841,3950 cw(c3841,3901.72) 3875.14,3935.86 cw(c3909.28,3970) JP2.25@3861,3970 ; JP2.25@3841,3970 3895,3916 3895,3545 3935.67,3504.33 U4.212@3935.67,3222.49
CLK12: JP4.25
CLK13: JP4.26 U4.91 | length 657.1
  Top Layer w10: JP4.26@3781.86,1379.14 ccw(c3747.72,1413.28) 3796,1413.28 ccw(c3844.28,1413.28) JP4.26@3810.14,1379.14 ; JP4.26@3796,1365 3796,1586.83 3975.04,1765.87 U4.91@3975.04,1872.1
CLK14: JP4.23 R6.1 R7.2 U4.90 U5.2 | length 2759.9
  Top Layer w10: U5.2@2814.32,1635.39 ccw(c2792.61,1657.1) 2823.31,1657.1 ccw(c2854.01,1657.1) U5.2@2832.3,1635.39 ; R6.1@2815.47,1703.44 cw(c2796.55,1684.52) 2823.31,1684.52 ; 2823.31,1652.06 cw(c2895.97,1652.06) R6.1@2844.59,1703.44 ; 2823.31,1676.2 cw(c2871.83,1676.2) R6.1@2837.52,1710.51 ; U5.2@2841.16,1617.41 cw(c2862.87,1595.7) 2862.87,1626.4 cw(c2862.87,1657.1) U5.2@2841.16,1635.39 ; R6.1@2848.53,1703.44 cw(c2883.68,1668.29) 2883.68,1718 cw(c2883.68,1767.71) R6.1@2848.53,1732.56 ; v1@2869.05,1621.45 ccw(c2857.1,1609.5) 2857.1,1626.4 ccw(c2857.1,1643.3) v1@2869.05,1631.35 ; v1(2874,1626.4) U5.2@2823.31,1626.4 2823.31,1709.31 R6.1@2832,1718 R7.2@2915,1718 ; R7.2@2898.47,1703.44 ccw(c2863.32,1668.29) 2863.32,1718 ccw(c2863.32,1767.71) R7.2@2898.47,1732.56 ; JP4.23@3696,1265 3750,1319 3750,1564.88 3955.35,1770.23 U4.90@3955.35,1872.1 ; JP4.23@3696,1285 ccw(c3696,1333.28) 3730.14,1299.14 ccw(c3764.28,1265) JP4.23@3716,1265
  Bottom Layer w10: v1(2874,1626.4) 2917.6,1670 3463,1670 3545,1588 3545,1249 3573,1221 3652,1221 JP4.23@3696,1265 ; v1@2874,1633.4 ccw(c2874,1650.3) 2885.95,1638.35 ccw(c2897.9,1626.4) v1@2881,1626.4 ; JP4.23@3676,1265 cw(c3627.72,1265) 3661.86,1230.86 cw(c3696,1196.72) JP4.23@3696,1245
CLK15: JP4.24 U4.89 | length 682.2
  Top Layer w10: JP4.24@3681.86,1379.14 ccw(c3647.72,1413.28) 3696,1413.28 ccw(c3744.28,1413.28) JP4.24@3710.14,1379.14 ; JP4.24@3696,1365 3696,1534.92 3935.67,1774.58 U4.89@3935.67,1872.1
CLKIN2: R21.2 R23.2 U4.92 | length 1323.8
  Top Layer w10: v1(3628,2170) v1(3995,2170) ; v1@3632.95,2165.05 cw(c3644.9,2153.1) 3644.9,2170 cw(c3644.9,2186.9) v1@3632.95,2174.95 ; v1(3982,1729) 3994.72,1741.72 U4.92@3994.72,1872.1 v1@3994.72,2092 ; v1@3982,1736 ccw(c3982,1752.9) 3993.95,1740.95 ccw(c4005.9,1729) v1@3989,1729 ; v1@3990.05,2087.05 cw(c3978.77,2075.77) 3994.72,2075.77 ; v1@3990.05,2165.05 ccw(c3978.1,2153.1) 3978.1,2170 ccw(c3978.1,2186.9) v1@3990.05,2174.95 ; 3994.72,2074.43 cw(c4012.57,2074.43) v1@3999.95,2087.05
  Bottom Layer w10: R21.2@3613.44,2242.47 cw(c3578.29,2207.32) 3628,2207.32 cw(c3677.71,2207.32) R21.2@3642.56,2242.47 ; v1@3623.05,2174.95 ccw(c3611.1,2186.9) 3628,2186.9 ccw(c3644.9,2186.9) v1@3632.95,2174.95 ; v1(3628,2170) R21.2@3628,2259 ; R23.2@3967.44,1692.53 ccw(c3932.29,1727.68) 3982,1727.68 ccw(c4031.71,1727.68) R23.2@3996.56,1692.53 ; v1@3977.05,1724.05 cw(c3965.1,1712.1) 3982,1712.1 cw(c3998.9,1712.1) v1@3986.95,1724.05 ; R23.2@3982,1676 v1(3982,1729) ; v1@3990.05,2096.95 ccw(c3978.1,2108.9) 3995,2108.9 ccw(c4011.9,2108.9) v1@3999.95,2096.95 ; v1@3990.05,2165.05 cw(c3978.1,2153.1) 3995,2153.1 cw(c4011.9,2153.1) v1@3999.95,2165.05 ; v1(3995,2092) v1(3995,2170)
DATA: EPCS.7 JP1.17 U4.24 U7.8 U10.2 U12.7 | length 3163.1
  Top Layer w10: JP1.17@2311,3147 cw(c2311,3098.72) 2345.14,3132.86 cw(c2379.28,3167) JP1.17@2331,3167 ; JP1.17@2311,3167 2358,3120 2433.96,3120 2462,3091.96 2462,3058.21 2709.21,2811 2938,2811 3040.5,2708.5 3154.23,2708.5 3187.49,2675.25 U4.24@3290,2675.25 ; EPCS.7@2693,3297 2800.88,3297 2920.2,3177.67 U12.7@2920.2,3127.51 ; EPCS.7@2707.14,3282.86 cw(c2741.28,3248.72) 2741.28,3297 cw(c2741.28,3345.28) EPCS.7@2707.14,3311.14 ; 2843.84,3254.04 ccw(c2856,3266.2) v1@2856,3249 ; 2844.14,3253.74 cw(c2832.4,3242) v1@2849,3242 ; v1@2856,3235 cw(c2856,3218.4) 2867.74,3230.14 ; v1@2863,3242 ccw(c2880.2,3242) 2868.04,3229.84 ; v1@2915.05,3088.95 ccw(c2903.1,3100.9) 2920,3100.9 ccw(c2936.9,3100.9) v1@2924.95,3088.95 ; v1(2920,3084) 2920,3127.31 U12.7@2920.2,3127.51 ; U12.7@2920.2,3129.51 U12.7@2920.2,3127.51
  Bottom Layer w10: JP1.17@2311,3167 2364,3220 2440,3220 2460,3240 2636,3240 EPCS.7@2693,3297 ; JP1.17@2311,3187 ccw(c2311,3235.28) 2345.14,3201.14 ccw(c2379.28,3167) JP1.17@2331,3167 ; EPCS.7@2673,3297 cw(c2624.72,3297) 2658.86,3262.86 cw(c2693,3228.72) EPCS.7@2693,3277 ; v1(2856,3242) 2891,3277 3120,3277 3188,3209 U7.8@3188,3162 ; v1@2856,3249 ccw(c2856,3265.9) 2867.95,3253.95 ccw(c2879.9,3242) v1@2863,3242 ; v1@2915.05,3079.05 cw(c2903.1,3067.1) 2920,3067.1 cw(c2936.9,3067.1) v1@2924.95,3079.05 ; v1(2920,3084) 2920,3001 2936,2985 2997,2985 3009.84,2997.84 U10.2@3009.84,3050 U10.2@3013,3053.16 ; U10.2@3003.63,3018.73 cw(c2988.65,3003.75) 3009.84,3003.75 cw(c3031.04,3003.75) U10.2@3016.05,3018.73 ; U10.2@3009.84,3060 U10.2@3009.84,3061.52 ; U7.8@3184.58,3194.95 ccw(c3176.31,3203.22) 3188,3203.22 ccw(c3199.69,3203.22) U7.8@3191.42,3194.95
DCLK: EPCS.1 JP1.18 R16.1 U4.23 U7.16 U10.6 U12.3 | length 2363.5
  Top Layer w10: JP1.18@2411,3147 cw(c2411,3098.72) 2445.14,3132.86 cw(c2479.28,3167) JP1.18@2431,3167 ; JP1.18@2411,3167 2538,3040 2650,3040 EPCS.1@2693,2997 ; EPCS.1@2673,2997 ccw(c2624.72,2997) 2658.86,3031.14 ccw(c2693,3065.28) EPCS.1@2693,3017 ; v1(2905,2840) 2933,2840 ; v1@2909.95,2835.05 cw(c2921.9,2823.1) 2921.9,2840 cw(c2921.9,2856.9) v1@2909.95,2844.95 ; 2945.8,2852 2933.8,2840 2933,2840 ; U12.3@2945.8,2944.13 2945.8,2839.2 ; U4.23@3290,2694.93 3191.84,2694.93 3161.27,2725.5 3059.5,2725.5 2945.8,2839.2 ; 2933,2840 2945,2840 2945.8,2839.2
  Bottom Layer w10: EPCS.1@2678.86,2982.86 cw(c2644.72,2948.72) 2693,2948.72 cw(c2741.28,2948.72) EPCS.1@2707.14,2982.86 ; EPCS.1@2693,2997 2693,2937 2783,2847 2790,2840 v1(2905,2840) 2940,2805 3050,2805 3059.84,2814.84 U10.6@3059.84,2861.34 ; R16.1@2825.44,2456.53 ccw(c2795.12,2486.85) 2838,2486.85 ; 2826,2840 2838,2828 ; U7.16@2834.58,2715.66 cw(c2826.31,2707.4) 2838,2707.4 cw(c2849.69,2707.4) U7.16@2841.42,2715.66 ; U7.16@2834.58,2781.57 ccw(c2826.31,2789.83) 2838,2789.83 ccw(c2849.69,2789.83) U7.16@2841.42,2781.57 ; R16.1@2838,2442 2838,2505 U7.16@2838,2748.61 2838,2828 ; 2838,2472.36 ccw(c2870.4,2472.36) R16.1@2847.49,2449.46 ; 2838,2496.51 ccw(c2894.54,2496.51) R16.1@2854.56,2456.53 ; 2838,2839 2838,2828 ; 2849,2840 2849,2839 2838,2828 ; v1@2900.05,2835.05 ccw(c2888.1,2823.1) 2888.1,2840 ccw(c2888.1,2856.9) v1@2900.05,2844.95 ; v1@2905,2833 cw(c2905,2816.1) 2916.95,2828.05 cw(c2928.9,2840) v1@2912,2840 ; U10.6@3053.63,2830.07 cw(c3038.65,2815.09) 3059.84,2815.09 cw(c3081.04,2815.09) U10.6@3066.05,2830.07